# Altium PCB 球锁蓝牙20618.PcbDoc (part 1 of 2)
Units mil, origin at the board's own origin, x right, y up, seen from the top; angles counter-clockwise.
Board outline 1946 x 1905.51 mil, 2 copper layers (Top Layer, Bottom Layer); 90 components, 56 nets, 267 pads, 202 vias.
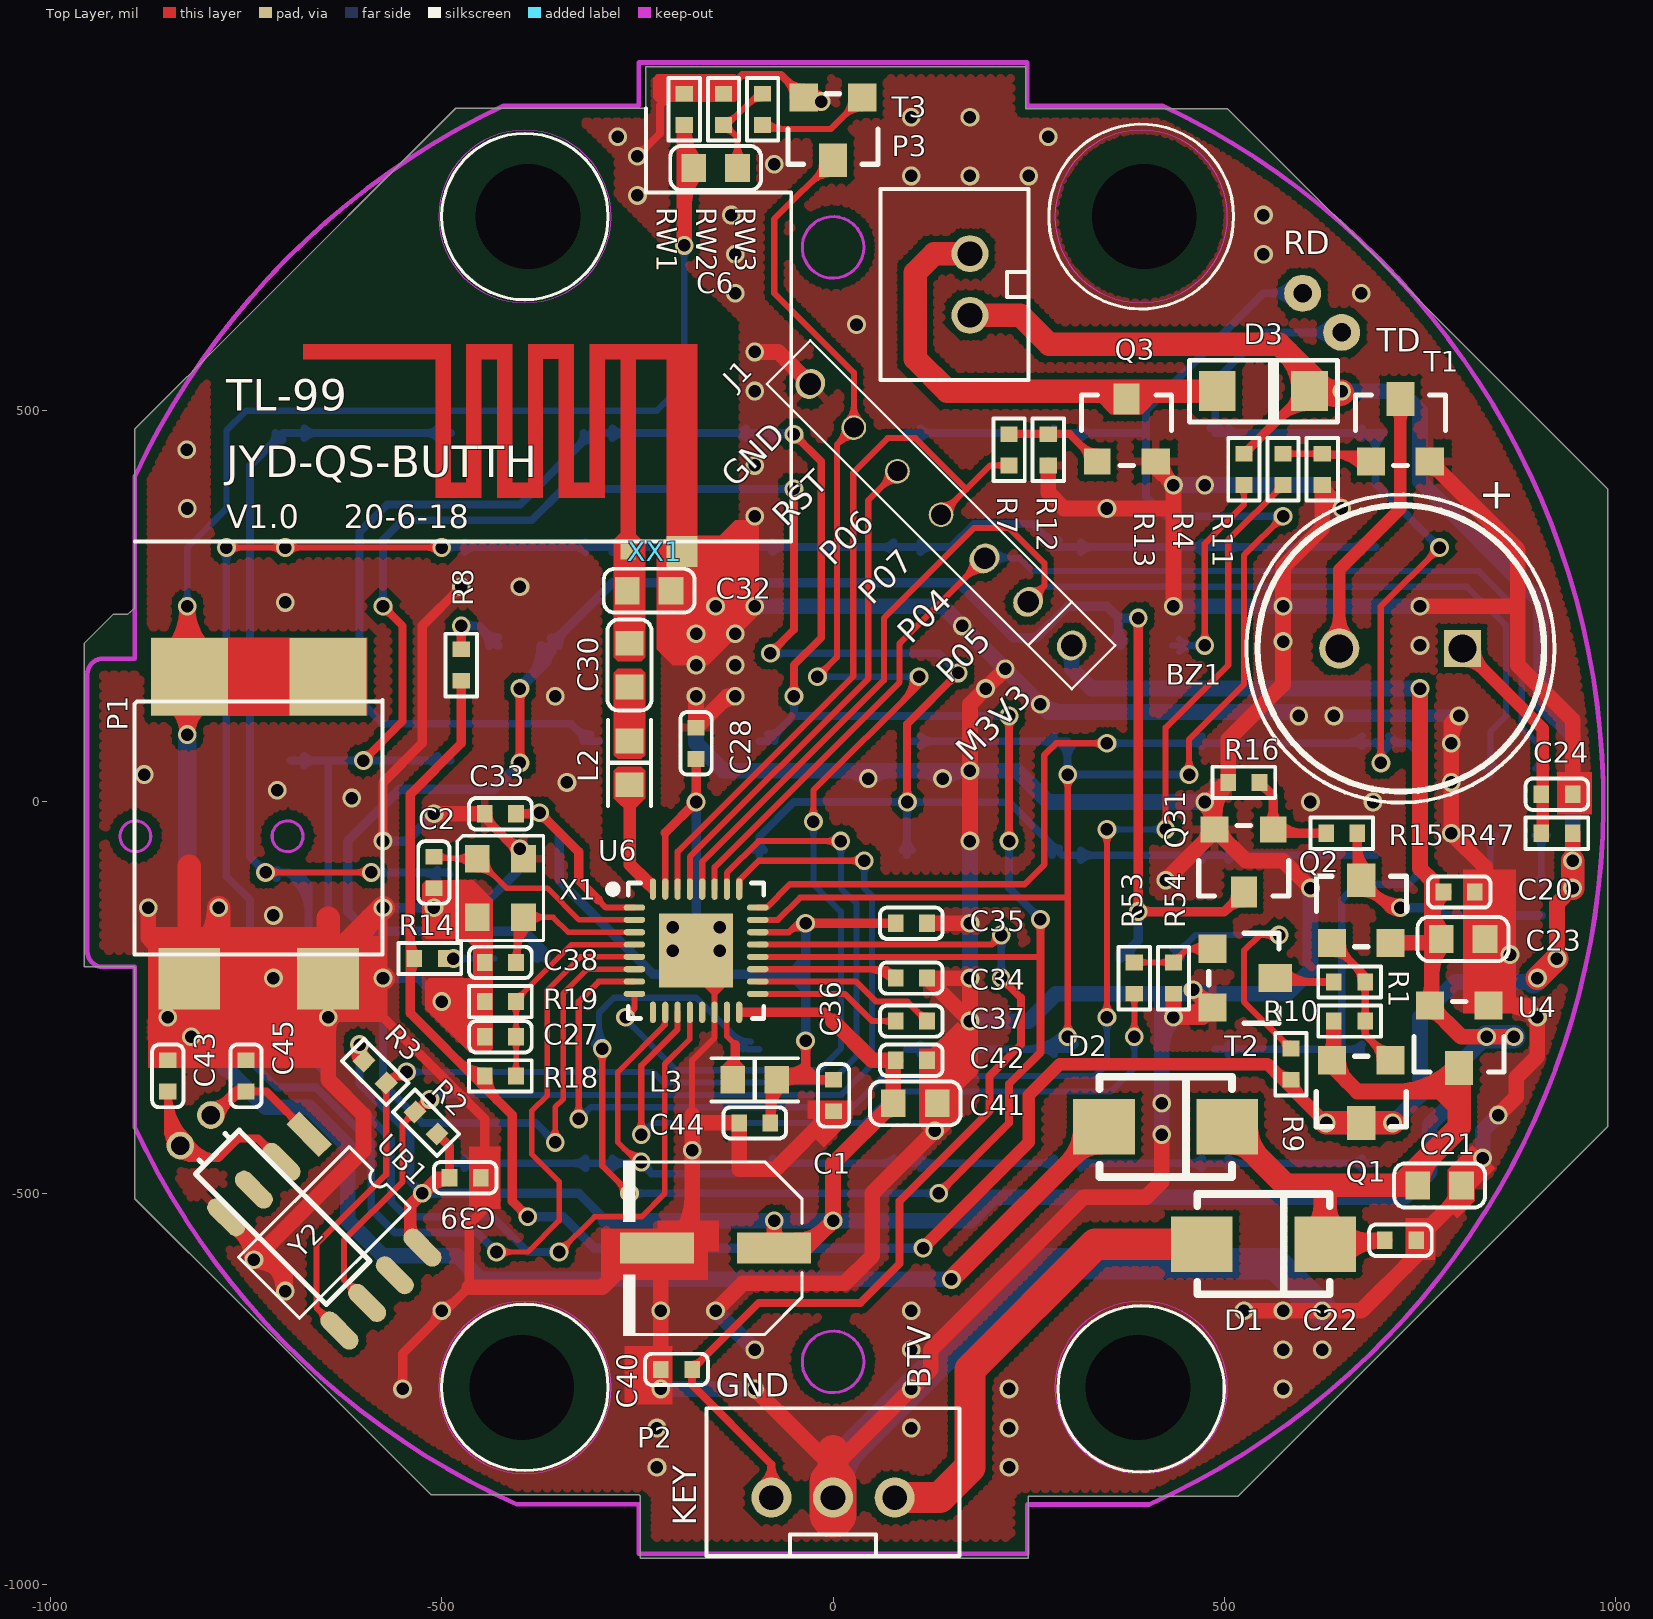
[diagram p0: Top Layer view]
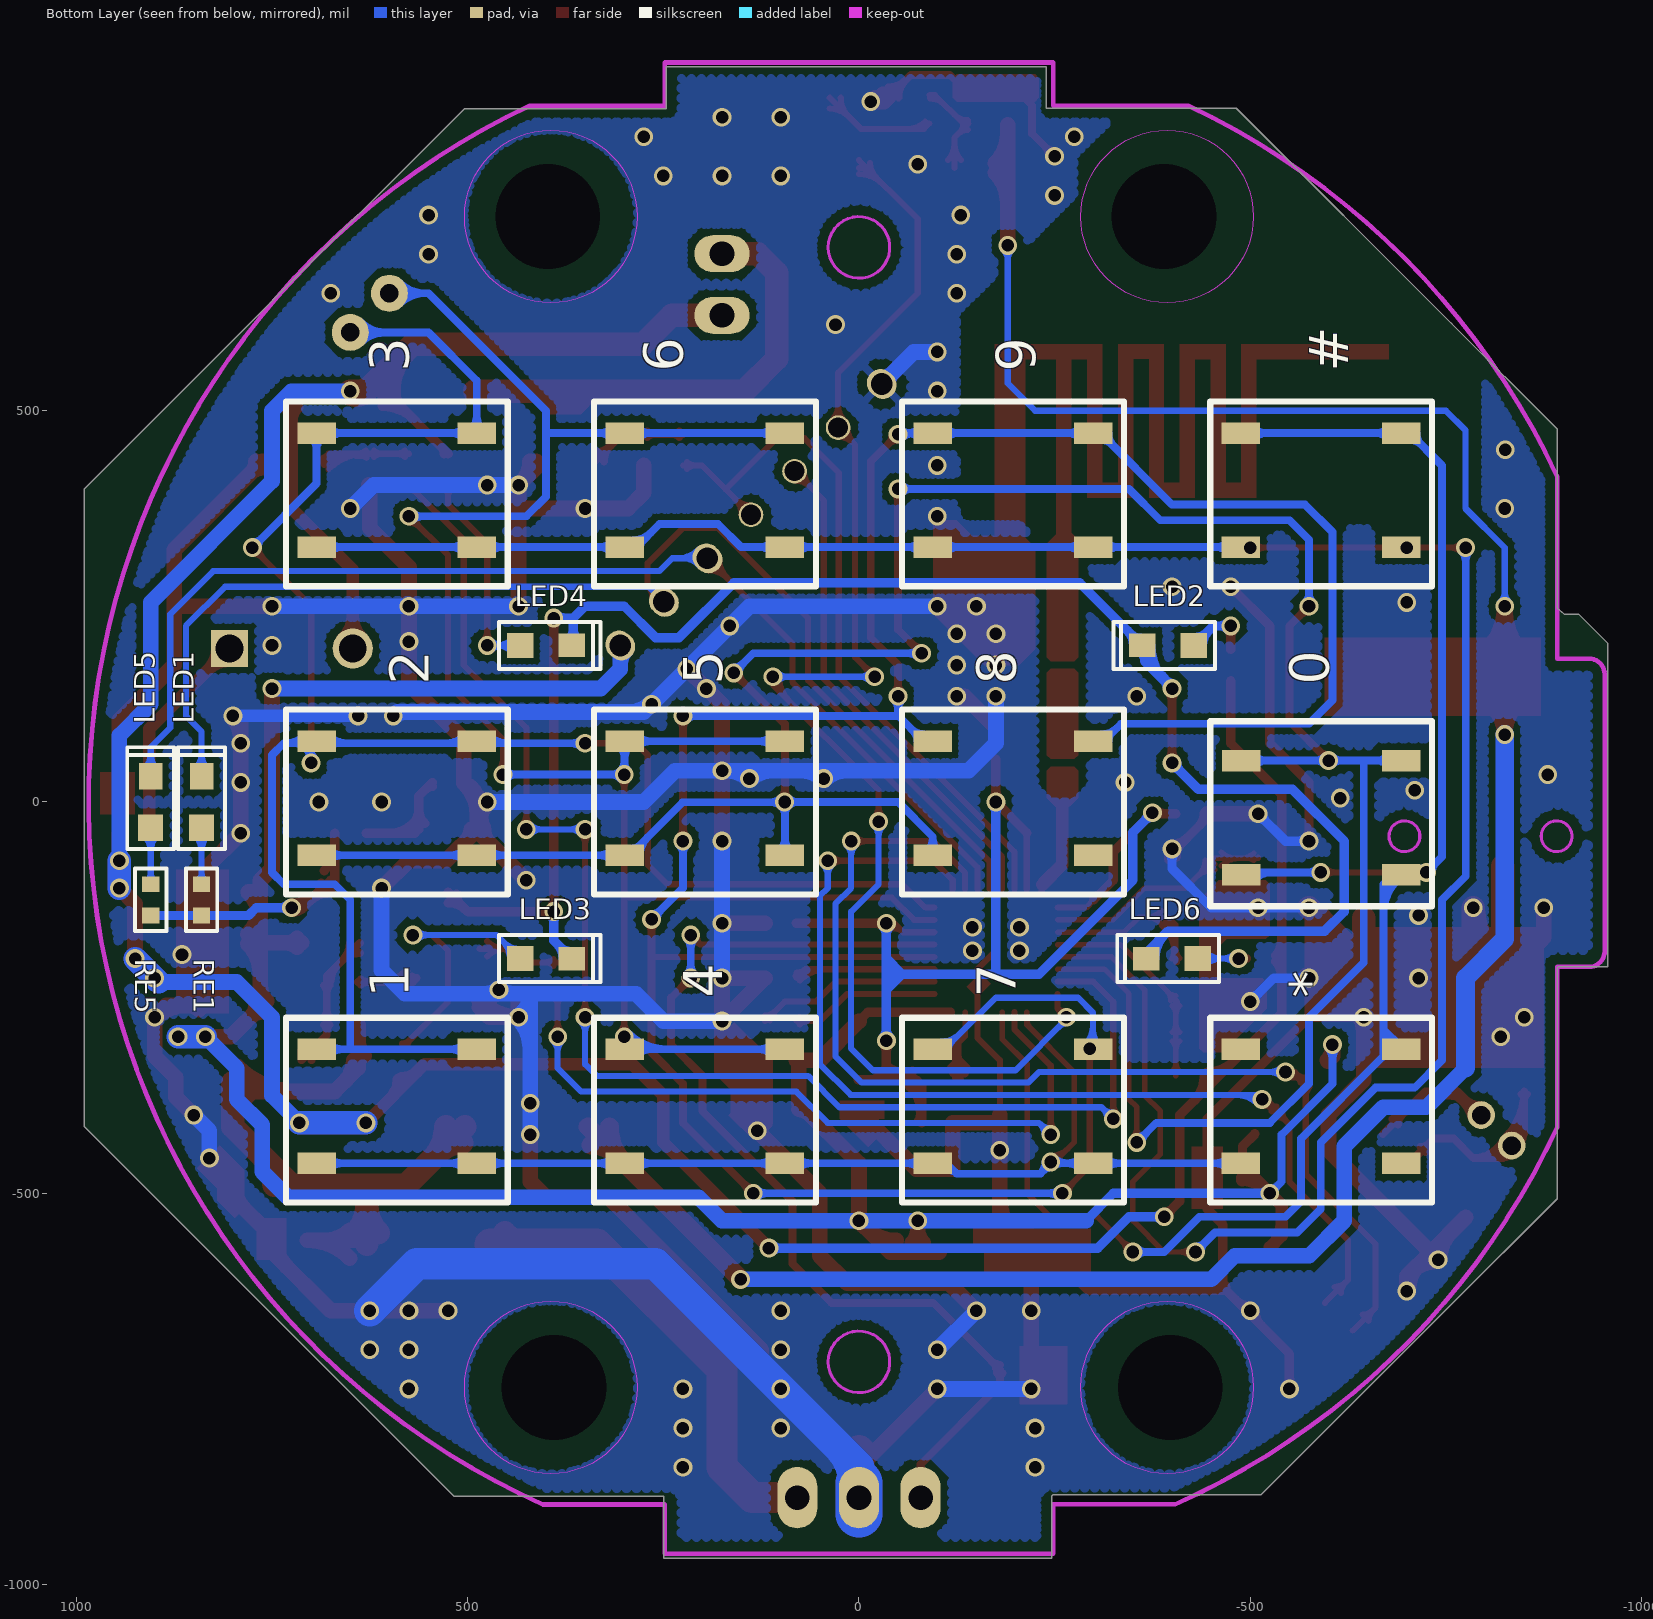
[diagram p1: Bottom Layer view, seen from below]
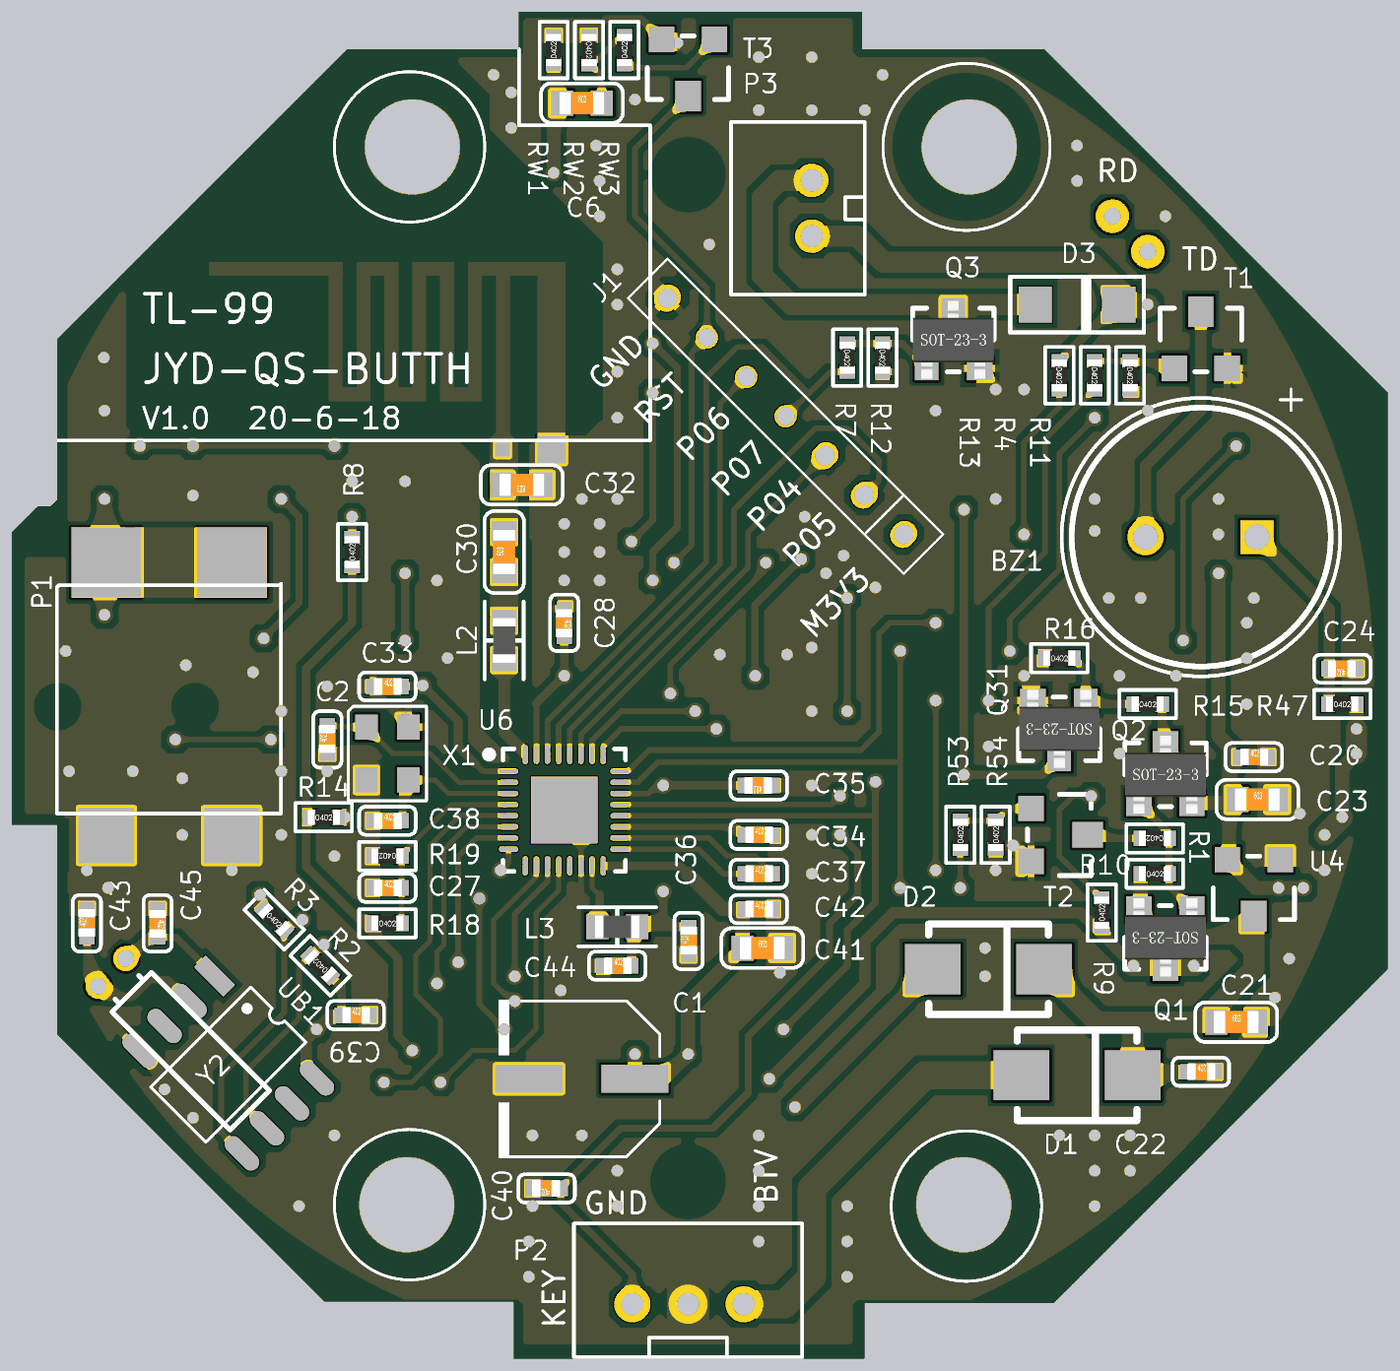
[diagram p3: 3D render of the assembled board from above, using the file's embedded part models]

## Layer stack, top to bottom
Top Layer: signal copper 1.4
Dielectric: core 12.6, FR-4, Dk 4.8
Bottom Layer: signal copper 1.4

## Board outline
-892.08,248.2 -892.08,390.26 -892.08,476.48 -757.1,611.46 -482.14,886.43 -409.85,886.43 -239.09,886.43 -239.09,939.38 245.95,939.38 245.95,885.99 402.13,885.99 503.79,885.99 762.58,627.2 989.58,400.2 989.58,-89.8 989.58,-414.97 678.73,-725.82 517.15,-887.39 249.49,-887.39 249.49,-966.13 -238.42,-966.13 -246.18,-966.13 -246.18,-887 -248.27,-884.9 -454.66,-884.9 -514.02,-884.9 -753.26,-645.66 -892.08,-506.84 -892.08,-424.8 -892.08,-211.4 -892.68,-210.8 -956.42,-210.8 -956.42,203.07 -930.88,228.61 -919.85,239.64 -901.42,239.64

## Design rules (kind name [scope] priority, off if disabled: settings)
Clearance Clearance_1 [(InPoly)Or(IsKeepOut) vs (InPoly)Or(IsKeepOut)] p1: gap=12
Clearance [All] p2: gap=7.87
ComponentClearance [All] p1: gap=0 collisioncheckmode=3 verticalgap=0 showdistances=FALSE
FabricationTestPointUsage TestPointUsage [All] p1: valid=0 allowmultiple=FALSE
FabricationTestpoint Testpoint [(IsPad And (OnTopLayer Or OnBottomLayer))] p1: side=3 testpointundercomponent=TRUE minsize=40 maxsize=100 preferedsize=60 minholesize=0 maxholesize=40 preferedholesize=32 testpointgrid=1 allowsidetop=TRUE allowsidebottom=TRUE usegrid=TRUE gridtolerance=0.01
HoleSize [All] p1: absolutevalues=TRUE maxlimit=1000 minlimit=1 maxpercent=80.000 minpercent=20.000
HoleToHoleClearance [All] p1: gap=0 allowstackedmicrovias=TRUE
MinimumSolderMaskSliver [All] p1: minsoldermaskwidth=0
PolygonConnect PolygonConnect_1 [IsVia] p1: connectstyle=Direct reliefconductorwidth=10 reliefentries=4 polygonreliefangle="90 Angle" airgapwidth=10
PolygonConnect [All] p2: connectstyle=Relief reliefconductorwidth=10 reliefentries=4 polygonreliefangle="90 Angle" airgapwidth=10
RoutingVias [All] p1: holewidth=15.75 width=23.62 viastyle="Through Hole" minholewidth=15.75 minwidth=23.62 maxholewidth=15.75 maxwidth=23.62
SilkToSilkClearance [All] p1: silktosilkclearance=0
SilkToSolderMaskClearance SilkscreenOverComponentPads [IsPad] p1: minsilkscreentomaskgap=0 clearancetoexposedcopper=TRUE
SolderMaskExpansion [All] p1: expansion=4
Width [All] p1: maxlimit=80 minlimit=6 preferedwidth=10
20 further rules are at their usual default settings.

## Components (designator, comment, footprint, x,y, rotation, side; value= is the part's Value field where it differs from the comment)
0 "SW" KEY_5.2*3.7*6.4 -590.55,-15 r180 bottom
1 "SW" KEY_5.2*3.7*6.4 590.55,-393.7 r0 bottom
2 "SW" KEY_5.2*3.7*6.4 590.55,0 r0 bottom
3 "SW" KEY_5.2*3.7*6.4 590.55,393.7 r0 bottom
4 "SW" KEY_5.2*3.7*6.4 196.85,-393.7 r0 bottom
5 "SW" KEY_5.2*3.7*6.4 196.85,0 r0 bottom
6 "SW" KEY_5.2*3.7*6.4 196.85,393.7 r0 bottom
7 "SW" KEY_5.2*3.7*6.4 -196.85,-393.7 r0 bottom
8 "SW" KEY_5.2*3.7*6.4 -196.85,0 r0 bottom
9 "SW" KEY_5.2*3.7*6.4 -196.85,393.7 r0 bottom
# "SW" KEY_5.2*3.7*6.4 -590.55,393.7 r0 bottom
* "SW" KEY_5.2*3.7*6.4 -590.55,-393.7 r0 bottom
BZ1 "BUZZER" BUZZER_D93_L40 725.58,196.2 r180 top locked
C1 "220uF/6.3V" R5*5.8 -150,-570 r180 top
C2 "12pF" 0402C -510,-90 r90 top
C6 "10uF/10V" 0603C -150,810 r0 top (schematic designator C?)
C20 "0.1uF" 0402C 800,-115 r0 top
C21 "22uF/10V" 0603C 775,-490 r0 top
C22 "0.1uF" 0402C 725,-560 r0 top
C23 "10uF/10V" 0603C 805,-175 r0 top
C24 "10uF/10V" 0402C 925,10 r180 top
C27 "1nF" 0402C -425,-300 r0 top
C28 "1uF/6.3V" 0402C -175,75 r270 top
C30 "1.5pF" 0603C -260,175 r90 top
C32 "1pF" 0603C -235,270 r180 top
C33 "0.1uF" 0402C -425,-15 r0 top
C34 "0.1uF" 0402C 100,-225 r0 top
C35 "1uF" 0402C 100,-155 r180 top
C36 "0.1uF" 0402C 0.75,-375 r90 top
C37 "0.1uF" 0402C 100,-280 r0 top
C38 "12pF" 0402C -425,-205 r0 top
C39 "0.1uF" 0402C -470,-480 r0 top
C40 "1nF" 0402C -200,-725 r180 top
C41 "10uF/6.3V" 0603C 105,-385 r0 top
C42 "0.1uF" 0402C 100,-330 r0 top
C43 "22PF" 0402C -850,-350 r90 top (schematic designator C26)
C44 "10uF/6.3V" 0402C -100,-410 r0 top
C45 "22PF" 0402C -750,-350 r270 top (schematic designator C28)
D1 "SS14" DO-214AA 550,-565 r180 top
D2 "SS14" DO-214AA 425,-415 r180 top
D3 "IN4148" SOD-123 550,525 r0 top
J1 "7P" 7P-2.0MM 305,200 r135 top
L2 "2nH" 0603L -260,50 r270 top
L3 "2.2uH" 0603L -100,-355 r180 top
LED1 "GREEN" 0603LED 840,0 r90 bottom
LED2 "Blue" 0603LED -395,200 r0 bottom
LED3 "Blue" 0603LED 400,-200 r180 bottom
LED4 "Blue" 0603LED 400,200 r180 bottom
LED5 "Red" 0603LED 905,0 r90 bottom
LED6 "Blue" 0603LED -400,-200 r0 bottom
P1 "MICROUSB" yingjix -819.42,-221.8 r90 top
P2 "电池盒" B3B-PH 0,-888.78 r180 top
P3 "外接磁线圈" B2B-PH 175,661.22 r270 top
Q1 "SI2301" "SOT-23 - GDS" 675,-370 r180 top
Q2 "SI2301" "SOT-23 - GDS" 675,-140 r0 top
Q3 "S8050" "SOT-23 - BCE" 375,475 r0 top
Q31 "PMBT3904" "SOT-23 - BCE" 525,-75 r180 top
R1 "1K" 0402R 660,-230 r180 top
R2 "10K" 0402R -520,-410 r135 top (schematic designator R24)
R3 "10K" 0402R -585,-345 r315 top (schematic designator R25)
R4 "1K" 0402R 575,425 r270 top
R7 "1K" 0402R 225,450 r270 top
R8 "1k" 0402R -475,175 r90 top
R9 "1K" 0402R 585,-335 r90 top
R10 "100K" 0402R 660,-280 r0 top
R11 "10K" 0402R 625,425 r270 top
R12 "10K" 0402R 275,450 r270 top
R13 "1K" 0402R 525,425 r270 top
R14 "1K" 0402R -515,-200 r0 top
R15 "10K" 0402R 650,-40 r0 top
R16 "4.7K" 0402R 525,25 r0 top
R18 "500K%1" 0402R -425,-350 r0 top
R19 "100K%1" 0402R -425,-255 r180 top
R47 "10R" 0402R 925,-40 r0 top
R53 "1K" 0402R 385,-225 r90 top
R54 "10K" 0402R 435,-225 r90 top
RE1 "1K" 0402R 840,-125 r90 bottom
RE5 "1K" 0402R 905,-125 r90 bottom
RW1 "100K" 0402R -190,885 r90 top
RW2 "100K" 0402R -140,885 r270 top
RW3 "100R" 0402R -90,885 r90 top
T1 "SS8050" SOT-23-3L 725,475 r0 top
T2 "PMBT3904" SOT-23-3L 525,-225 r270 top
T3 "PMBT3904" SOT-23-3L 0,860 r180 top
U4 "HT7533" SOT-23-3L 800,-300 r180 top
U6 "BK3431Q" QFN32_4*4*0.4 -175,-190 r0 top
UB1 "PCF8563" SOP8 -650,-550 r315 top (schematic designator U5)
X1 "16MHZ" XTAL3225 -425,-110 r270 top
XX1 "TIANX" BT_NAMI_1 -262,290 r0 top
Y2 "32.768KHZ" 晶振-9 -795,-400 r225 top (schematic designator Y1)

## Footprints (in the part's own frame and the unit in brackets; to place one, negate y for a bottom-side part, rotate by r counter-clockwise, add the part's x,y. Pads: shape width x height; smd on the part's side, far side on the other; paste and mask are expansions set on the pad)
7P-2.0MM [mm]
  oval 0.9x1 hole 0.7 mask+0.05: 1(0,0) 2(2,0) 3(4,0) 7(12,0)
  round 0.8 hole 0.65 mask+0.05: 4(6,0) 5(8,0) 6(10,0)
  silkscreen extent -1,-1 13,1
0402C [mil]
  rect 20x22 smd mask+2: 1(-20,0) 2(20,0)
  silkscreen extent -40,-20 40,20, body extent -19,-12 20,12, height 8
0402R [mil]
  rect 20x22 smd mask+2: 1(-20,0) 2(20,0)
  silkscreen extent -40,-20 40,20, body extent -23,-11 23,11, height 16
0603C [mm]
  rect 0.8x0.9 smd: 1(-0.711,0) 2(0.711,0)
  silkscreen extent -1.47,-0.71 1.47,0.71, body extent -0.8,-0.4 0.8,0.4, height 0.3
0603L [mm]
  rect 0.8x0.9 smd: 1(-0.711,0) 2(0.711,0)
  silkscreen extent -1.4,-0.7 1.4,0.7, body extent -0.82,-0.41 0.83,0.41, height 0.46
0603LED [mil]
  rect 34x32 smd: 1(-33,0)
  rect 34x30 smd: 2(33,0)
  silkscreen extent -60,-30 70,30, body extent -31,-16 31,16, height 24
B2B-PH [mm]
  round 1.2 / inner round 1.2 / far side oval 1.2x1.8 hole 0.8 mask+0.05: 1(-1,0) 2(1,0)
  silkscreen extent -3.1,-2.9 3.1,1.9
B3B-PH [mm]
  round 1.3 / inner round 1.3 / far side oval 1.3x2 hole 0.8 mask+0.05: 1(-2,0) 2(0,0) 3(2,0)
  silkscreen extent -4.1,-2.9 4.1,1.9
BT_NAMI_1 [mm]
  rect 0.5x0.5 smd: 1(0,0.762)
  rect 1x1 smd: 2(1.753,0.762)
  Top Layer region: -3.25,7.004 -1.75,7.004 -1.75,7.504 -3.25,7.504
  Top Layer region: -2.25,2.5 -1.75,2.5 -1.75,7.5 -2.25,7.5
  Top Layer region: -2.25,2.5 -0.75,2.5 -0.75,3 -2.25,3
  Top Layer region: -1.25,2.504 -0.75,2.504 -0.75,7.504 -1.25,7.504
  Top Layer region: -1.25,7 2.25,7 2.25,7.5 -1.25,7.5
  Top Layer region: -0.247,0.762 0.253,0.762 0.253,7.5 -0.247,7.5
  Top Layer region: 1.25,0.762 2.25,0.762 2.25,7.5 1.25,7.5
  Top Layer region: -3.25,2.5 -2.75,2.5 -2.75,7.5 -3.25,7.5
  Top Layer region: -4.25,2.5 -2.75,2.5 -2.75,3 -4.25,3
  Top Layer region: -4.25,2.499 -3.75,2.499 -3.75,7.499 -4.25,7.499
  Top Layer region: -5.25,7 -3.75,7 -3.75,7.5 -5.25,7.5
  Top Layer region: -5.249,2.5 -4.749,2.5 -4.749,7.5 -5.249,7.5
  Top Layer region: -6.25,2.5 -4.75,2.5 -4.75,3 -6.25,3
  Top Layer region: -6.25,2.499 -5.75,2.499 -5.75,7.499 -6.25,7.499
  Top Layer region: -10.55,7 -5.75,7 -5.75,7.5 -10.55,7.5
BUZZER_D93_L40 [mm]
  rect 1.2x1.2 hole 0.9: 1(-2,0)
  round 1.3 hole 0.9: 2(2,0)
  silkscreen extent -4.65,-4.65 4.65,4.65
DO-214AA [mm]
  rect 2x1.8 smd: 1(2,0) 2(-2,0)
  silkscreen extent -2.15,-1.63 2.15,1.63
KEY_5.2*3.7*6.4 [mm]
  rect 1.25x0.7 smd: 1(-2.595,1.726) 1(2.604,1.726) 2(-2.595,-1.974) 2(2.604,-1.974)
  silkscreen extent -3.6,-3 3.6,3
QFN32_4*4*0.4 [mm]
  rect 2.4x2.4 smd paste-0.025 mask+0.051: 0(0,0)
  oval 0.7x0.2 smd paste-0.025 mask+0.051: 1(-2,1.4) 2(-2,1) 3(-2,0.6) 4(-2,0.2) 5(-2,-0.2) 6(-2,-0.6) 7(-2,-1) 8(-2,-1.4) 17(2,-1.4) 18(2,-1) 19(2,-0.6) 20(2,-0.2) 21(2,0.2) 22(2,0.6) 23(2,1) 24(2,1.4)
  oval 0.2x0.7 smd paste-0.025 mask+0.051: 9(-1.4,-2) 10(-1,-2) 11(-0.6,-2) 12(-0.2,-2) 13(0.2,-2) 14(0.6,-2) 15(1,-2) 16(1.4,-2) 25(1.4,2) 26(1,2) 27(0.6,2) 28(0.2,2) 29(-0.2,2) 30(-0.6,2) 31(-1,2) 32(-1.4,2)
  silkscreen extent -2.82,-2.2 2.2,2.2
R5*5.8 [mm]
  rect 2.4x1 smd: 1(-1.9,0) 2(1.9,0)
  silkscreen extent -2.8,-2.85 3,2.85
SOD-123 [mm]
  rect 1.2x1.3 smd mask+0.05: 1(-1.5,0) 2(1.5,0)
  silkscreen extent -2.4,-1 2.4,1
SOP8 [mm]
  rect 1.5x0.6 smd mask+0.05: 1(-2.6,1.905)
  oval 1.5x0.6 smd mask+0.05: 2(-2.6,0.635) 3(-2.6,-0.635) 4(-2.6,-1.905) 5(2.6,-1.905) 6(2.6,-0.635) 7(2.6,0.635) 8(2.6,1.905)
  round 0.4 on Top Overlay mask+0.05: ""(-0.949,1.905)
  silkscreen extent -1.4,-2.54 1.4,2.54
"SOT-23 - BCE" [mm]
  rect 0.85x0.85 smd: B(-0.95,-1.016)
  rect 0.85x1 smd: C(0,1.016)
  rect 0.914x0.85 smd: E(0.95,-1.016)
  silkscreen extent -1.46,-1.14 1.46,1.14, body extent -1.45,-1.4 1.45,1.4, height 1.2
"SOT-23 - GDS" [mil]
  rect 36x43.31 smd: D(0,40)
  rect 36x36 smd: G(-37.4,-40) S(37.4,-40)
  silkscreen extent -57,-45 58,45, body extent -57,-55 57,55, height 47
SOT-23-3L [mil]
  rect 36x36 smd: 1(-37.4,-40) 2(37.4,-40)
  rect 36x43.31 smd: 3(0,40)
  silkscreen extent -57,-45 58,45
XTAL3225 [mm]
  rect 0.9x0.8 smd: 1(-0.95,-0.75) 2(0.95,-0.75) 3(0.95,0.75) 4(-0.95,0.75)
  silkscreen extent -1.7,-1.4 1.7,1.4
yingjix [mm]
  rect 2x2 smd: 1(-0.102,0.076) 1(-0.102,-4.424)
  rect 2.5x2.5 smd: 2(9.698,-4.424) 2(9.698,0.076)
  silkscreen extent 0.69,-6.2 8.94,1.85
晶振-9 [mm]
  round 0.9 hole 0.6: 1(0,0) 2(1.4,0)
  rect 0x0 smd: 3(0.635,8)
  silkscreen extent -0.3,0.76 1.7,7

## Part data
0 1 2 3 4 5 6 7 8 9 # *: "Switch"
BZ1: "Buzzer"
C1 C21 C23: library part CAP-P, "Capacitor, tolerance ±20%"
C2 C28 C30 C32 C33 C34 C35 C36 C37 C38 C41 C42 C44: library part Cap, "Capacitor"
C6 C20 C22 C27: library part CAP-NP, "Capacitor, Ceramic"
C24: library part C_0_Dup1
C39 C40 C43 C45: library part C
D1 D2 D3: library part D
L2 L3: "Power Inductor, 4.7uH, 0.7A, 260mR DCR"
LED1 LED2 LED3 LED4 LED5 LED6: library part LED
P1: library part MHDR1X2, "Header, 2-Pin"
P2: library part "Header 3", "Header, 3-Pin"
P3: library part "Header 2", "Header, 2-Pin"
Q1 Q2: library part PWRMOSFET_EP_DGS_0
Q3: library part PMBT3904_Dup1
R1 R8 R9 R10 R13 R14 R15 R16 R53 R54 RE1 RE5 RW1 RW2 RW3: library part R
R2 R3 R7 R12: library part RES
R4 R11 R47: library part R_Dup1
R18 R19: library part Res2, "Resistor"
T1 T2 T3: library part NPN_BJT, "Bipolar Junction Transistor"
U4: library part XC6206P302M
UB1: library part IC8
Y2: library part 晶振

## Free pads (board coordinates)
  round 47.24 hole 23.62: 0(650,600) 1(600,650)
  round 10 hole 133.86: 1(-397.64,-748.03) 2(-389.76,748.03) 3(397.64,748.03) 4(389.76,-748.03)

## Via types
v1: diameter 24, hole 16, Top Layer to Bottom Layer, tented both sides, 202 vias

## Nets (pads, with @x,y where several pads share a name; then routed paths per layer and width w, separated by ;. In a path a pad name is that pad's centre, name@x,y a point inside that pad or via, vN(x,y) a via of type N, cw(c..) or ccw(c..) an arc to the next point about the centre after c; other vN are vias at no path point)
BAT_ADC: C27.2 R18.2 R19.1 U6.4 | length 401.7
  Top Layer w7: R18.2@-409.6,-344.4 ccw(c-420.69,-333.31) -405,-333.31 ccw(c-389.31,-333.31) R18.2@-400.4,-344.4 ; C27.2@-409.6,-305.6 cw(c-420.69,-316.69) -405,-316.69 cw(c-389.31,-316.69) C27.2@-400.4,-305.6 ; C27.2@-409.6,-294.4 ccw(c-420.69,-283.31) -405,-283.31 ccw(c-389.31,-283.31) C27.2@-400.4,-294.4 ; R19.1@-409.6,-260.6 cw(c-420.69,-271.69) -405,-271.69 cw(c-389.31,-271.69) R19.1@-400.4,-260.6 ; R19.1@-407,-255 -334.13,-182.13 U6.4@-253.74,-182.13 ; R18.2@-405,-350 R19.1@-405,-255 ; R19.1@-405,-247.5 ccw(c-405,-234.22) -395.61,-243.61 ; R19.1@-398.5,-254 cw(c-380.39,-254) -393.2,-241.2
BEEP: R4.2 U6.7 | length 2074.9
  Top Layer w7.87: v1@-330.57,-399.43 ccw(c-344.01,-385.99) -325,-385.99 ccw(c-305.99,-385.99) v1@-319.43,-399.43 ; v1(-325,-405) -325,-255 -299.37,-229.37 U6.7@-253.74,-229.37 ; v1@344.43,-269.43 ccw(c330.99,-255.99) 350,-255.99 ccw(c369.01,-255.99) v1@355.57,-269.43 ; v1@344.43,-40.57 cw(c330.99,-54.01) 350,-54.01 cw(c369.01,-54.01) v1@355.57,-40.57 ; v1(350,-275) v1(350,-35) ; v1@419.43,-29.43 ccw(c405.99,-15.99) 425,-15.99 ccw(c444.01,-15.99) v1@430.57,-29.43 ; v1(425,-35) 425,95 505,175 505,335 R4.2@575,405 ; 562.94,392.94 ccw(c550.89,405) R4.2@567.94,405 ; R4.2@565.36,395.36 cw(c574,386.71) R4.2@574,398.94
  Bottom Layer w7.87: v1(-325,-405) -310,-390 25,-390 65,-350 335,-350 350,-335 v1(350,-275) ; v1@-325,-397.13 ccw(c-325,-378.12) -311.56,-391.56 ccw(c-298.12,-405) v1@-317.13,-405 ; v1@344.43,-280.57 cw(c330.99,-294.01) 350,-294.01 cw(c369.01,-294.01) v1@355.57,-280.57 ; v1(350,-35) v1(425,-35) ; v1@355.57,-40.57 cw(c369.01,-54.01) 369.01,-35 cw(c369.01,-15.99) v1@355.57,-29.43 ; v1@419.43,-40.57 ccw(c405.99,-54.01) 405.99,-35 ccw(c405.99,-15.99) v1@419.43,-29.43
GND: C1.2 C2.1 C20.2 C21.2 C22.2 C23.2 C24.1 C27.1 C28.1 C30.2 C32.1 C32.2 C33.1 C34.2 C35.1 C36.1 C38.1 C39.2 C40.2 C41.2 C42.2 C43.2 C44.1 C45.1 J1.7 P1.1 P2.2 Q3.E Q31.E R11.2 R12.2 R16.1 R19.2 R54.1 RW1.2 RW2.1 T1.2 T2.2 T3.2 U4.1 U6.0 U6.14 UB1.4 X1.2 X1.4 XX1.1 XX1.2 | length 19333.8
  Top Layer w7.87: -180,-400 -180,-330 -151.38,-301.38 U6.14@-151.38,-268.74 -151.38,-213.62 U6.0@-175,-190
  Top Layer w10: -645,-325 -645.26,-324.74 -645,-324.49 ; v1(-250,825) -221.22,853.78 -221.22,890 -207,904.22 RW2.1@-140,904.22 ; v1@-250,832 ccw(c-250,848.9) -238.05,836.95 ccw(c-226.1,825) v1@-243,825 ; -204.95,904.22 ccw(c-204.95,918.95) RW1.2@-194.54,908.54 ; -201.19,904.22 cw(c-201.19,894.81) RW1.2@-194.54,901.46 ; RW1.2@-185.46,901.46 cw(c-178.81,894.81) -178.81,904.22 ; RW1.2@-185.46,908.54 ccw(c-175.05,918.95) -175.05,904.22 ; -154.95,904.22 ccw(c-154.95,918.95) RW2.1@-144.54,908.54 ; -151.19,904.22 cw(c-151.19,894.81) RW2.1@-144.54,901.46 ; RW2.1@-140,905 -115.94,929.06 -66.46,929.06 T3.2@-37.4,900 ; RW2.1@-139,910 ccw(c-139,919.66) RW2.1@-132.17,912.83 ; RW2.1@-134,905 cw(c-119.51,905) -129.76,915.24 ; T3.2@-50.4,900 ccw(c-81.79,900) -59.59,922.19 ccw(c-37.4,944.38) T3.2@-37.4,913
  Top Layer w12: P1.1@-645.26,-225.8 -644.46,-225 v1(-575,-225) ; P1.1@-628.95,-211.99 ccw(c-600.88,-188.24) -600.88,-225 ; P1.1@-628.45,-238.99 cw(c-599.68,-261.57) -599.68,-225 ; P1.1@-619.79,-204.24 ccw(c-575,-166.33) v1(-575,-225) ; P1.1@-619.01,-246.4 cw(c-575,-280.94) v1(-575,-225) ; v1@-580.03,-227.91 ccw(c-592.18,-234.92) -588.55,-221.37 ccw(c-584.92,-207.81) v1@-577.91,-219.97 ; v1@-580.03,-222.09 cw(c-592.18,-215.08) -588.55,-228.63 cw(c-584.92,-242.18) v1@-577.91,-230.03 ; v1@-579.24,-45.76 ccw(c-589.49,-35.51) -575,-35.51 ccw(c-560.51,-35.51) v1@-570.76,-45.76 ; v1@-579.11,-139.11 cw(c-589.03,-149.03) -575,-149.03 cw(c-560.97,-149.03) v1@-570.89,-139.11 ; v1(-575,-135) v1(-575,-225) ; v1(-575,-50) -575,25 -525,75 -525,225 v1(-475,275) ; v1@-570.89,-229.11 ccw(c-560.97,-239.03) -575,-239.03 ccw(c-589.03,-239.03) -579.11,-229.11 ccw(c-589.03,-239.03) -589.03,-225 ccw(c-589.03,-210.97) -579.11,-220.89 ccw(c-589.03,-210.97) -575,-210.97 ccw(c-560.97,-210.97) v1@-570.89,-220.89 ; v1@-554.24,-745.76 ccw(c-564.49,-735.51) -550,-735.51 ccw(c-535.51,-735.51) v1@-545.76,-745.76 ; v1(-550,-750) -550,-705 -465,-620 -465,-540 -445,-520 -445,-405 -575,-275 v1(-575,-225) ; v1@-514.38,-139.38 ccw(c-495,-120) -495,-147.4 ; v1@-514.11,-130.89 ccw(c-524.03,-120.97) -510,-120.97 ccw(c-495.97,-120.97) -505.89,-130.89 ccw(c-466.03,-91.03) X1.2@-466.03,-147.4 ; -513.78,-668.78 ccw(c-532.56,-650) v1@-506,-650 ; v1@-510,-140.81 cw(c-510,-154.84) -500.08,-144.92 cw(c-490.16,-135) v1@-504.19,-135 ; C2.1@-510,-110 v1(-510,-135) -497.6,-147.4 X1.2@-454.53,-147.4 ; v1@-500,-644 ccw(c-500,-617.44) -481.22,-636.22 ; v1(-500,-255) R19.2@-445,-255 ; v1@-495.89,-259.11 cw(c-485.97,-269.03) -485.97,-255 cw(c-485.97,-240.97) v1@-495.89,-250.89 ; v1@-480.81,275 cw(c-494.84,275) -484.92,265.08 cw(c-475,255.16) v1@-475,269.19 ; X1.2@-461.42,-154.29 ccw(c-478.06,-170.94) -478.06,-147.4 ccw(c-478.06,-123.87) X1.2@-461.42,-140.51 ; C39.2@-452.83,-483.83 cw(c-471.73,-502.73) -445,-502.73 ; C39.2@-452.83,-476.17 ccw(c-471.73,-457.27) -445,-457.27 ; C27.1@-445,-300 R19.2@-445,-255 ; C38.1@-445,-205 R19.2@-445,-255 ; C33.1@-445,-15 -445,-20 -395.47,-69.53 X1.4@-395.47,-72.6 ; C33.1@-441,-16 ccw(c-421.69,-16) -435.34,-29.66 ; -418.78,-46.22 ccw(c-400,-27.44) v1@-400,-54 ; -412.89,-52.11 cw(c-431.42,-70.63) X1.4@-405.22,-70.63 ; v1@-410.23,-54.77 ccw(c-395.47,-40.01) X1.4@-395.47,-60.88 ; X1.4@-401.41,-65.83 cw(c-403.25,-73.39) X1.4@-395.47,-73.39 ; C32.1@-207,270 -193,270 -170,270 v1(-150,250) ; C32.1@-200.11,263.11 cw(c-183.47,246.47) -183.47,270 cw(c-183.47,293.53) C32.1@-200.11,276.89 ; v1@-155.81,250 ccw(c-169.84,250) -159.92,259.92 ccw(c-150,269.84) v1@-150,255.81
  Top Layer w20: v1(-875,-135) -875,-173.22 P1.1@-822.42,-225.8 -850,-253.38 C43.2@-850,-330 C45.1@-750,-330 ; P1.1@-851.79,-225.8 ccw(c-922.7,-225.8) -872.56,-175.66 ccw(c-822.42,-125.52) P1.1@-822.42,-196.43 ; v1@-851.48,-276.34 cw(c-876.93,-299.42) -843.58,-307.67 ; v1@-850.11,-273 ccw(c-853.53,-212.59) P1.1@-808.4,-252.89 ; -850,-295.73 cw(c-774.72,-295.73) P1.1@-817.14,-233.54 ; P1.1@-850,-257.88 cw(c-800.54,-257.88) P1.1@-828.41,-217.02 ; v1@-848,-275 cw(c-790.97,-275) P1.1@-831.3,-234.67 ; UB1.4@-775.41,-530.65 -730.53,-575.53 ; UB1.4@-756.8,-549.26 cw(c-792.54,-585) v1@-742,-585 ; -750,-225.8 C45.1@-750,-330 ; v1@-740,-587 cw(c-740,-637.54) -704.26,-601.8 ; v1(-740,-585) -730.53,-575.53 ; -716.48,-589.59 cw(c-751.89,-625) v1@-701.81,-625 ; v1(-700,-625) -700,-606.07 -730.53,-575.53 ; P1.1@-666.02,-246.56 cw(c-716.78,-297.32) -645,-297.32 ; P1.1@-659,-251.75 cw(c-671.3,-275) v1(-645,-275) ; -653.77,-266.4 ccw(c-641.12,-258.58) v1@-644.54,-273.05 ; -645,-335 -650,-330 C45.1@-750,-330 ; -645,-296.09 cw(c-574.97,-296.09) P1.1@-624.49,-246.56 ; P1.1@-631.12,-251.54 ccw(c-618.24,-275) v1(-645,-275) ; v1(-510,-15) C33.1@-445,-15 ; -465,-620 -295,-620 -250,-575 C1.2@-222.83,-575 ; -274.1,-599.1 ccw(c-303.2,-570) C1.2@-262.05,-570 ; C1.2@-231.65,-576.85 cw(c-259.78,-604.98) -220,-604.98 ; v1(-220,-750) C40.2@-220,-725 v1(-220,-650) -220,-577.83 C1.2@-222.83,-575 ; C32.1@-211.06,276.03 ccw(c-254.68,319.64) XX1.2@-193,319.64 ; C1.2@-204.09,-563.15 ccw(c-262.26,-504.99) -180,-504.99 ; XX1.2@-201.39,315.16 cw(c-221.91,303.31) -199.02,297.18 ; -200,215 -150,215 ; XX1.2@-199.85,313.15 cw(c-216.38,296.62) -193,296.62 cw(c-169.62,296.62) XX1.2@-186.15,313.15 ; -198.91,297.61 cw(c-176.62,291.64) XX1.2@-188.16,311.61 ; C32.1@-193,270 XX1.2@-193,320 ; C1.2@-189.95,-577.29 ccw(c-213.97,-553.27) C1.2@-180,-553.27 ; -180,-400 -180,-410 ; v1(-175,135) C28.1@-175,95 -135,135 v1(-125,135) ; v1(-150,-650) -115,-615 15,-615 50,-580 50,-500 v1(130,-420) 133,-417 C41.2@133,-385 175,-343 175,-330 ; -145.49,124.51 cw(c-125,104.03) v1@-125,133 ; v1(-100,-750) 0,-850 ; v1(-100,575) -70,575 J1.7@-29.07,534.07 ; J1.7@-36.78,534.07 ccw(c-55.41,534.07) -42.24,547.24 ccw(c-29.07,560.41) J1.7@-29.07,541.78 ; T3.2@-31.9,900 cw(c-31.9,878.1) v1@-16.41,893.59 ; T3.2@-30.46,903.97 ccw(c-15,912.8) v1(-15,895) ; v1@-15.94,896.77 cw(c-24.48,912.92) T3.2@-37.4,900 ; P2.2@-11.02,-877.76 ccw(c-37.64,-851.14) 0,-851.14 ccw(c37.64,-851.14) P2.2@11.02,-877.76 ; P2.2@0,-888.78 0,-850 ; C36.1@0.75,-395 -73.29,-469.04 -120,-469.04 C44.1@-120,-410 -180,-410 ; C35.1@120,-155 v1(175,-155) ; 133,-407.93 cw(c117.93,-407.93) 128.59,-418.59 120,-410 C42.2@120,-330 175,-330 ; C41.2@133,-377.28 ccw(c133,-358.65) C41.2@146.17,-371.83 ; v1(175,-50) v1(175,40) 175,125 v1(195,145) v1(220,170) ; R12.2@275,430 275,395 295,375 v1(350,375) 435,375 ; Q3.E@412.4,435 412.4,427.6 v1(435,405) 435,375 ; v1(420,-425) 420,-485 400,-505 320,-505 125,-700 125,-725 v1(100,-750) 0,-850 ; Q3.E@420.4,435 ccw(c457.59,435) v1@431.29,408.71 ; v1(425,-100) 487.6,-37.4 Q31.E@487.6,-35 ; R54.1@435,-245 v1(435,-275) 472.4,-275 T2.2@485,-262.4 482.4,-262.4 v1(460,-240) ; v1(435,250) 435,375 ; v1@435.27,-275 ccw(c435.27,-212.67) T2.2@479.34,-256.75 ; v1@466.91,-246.91 ccw(c485,-228.82) T2.2@485,-254.4 ; 472.24,-52.76 ccw(c454.49,-35) Q31.E@479.6,-35 ; v1@473.59,-1.41 cw(c439.76,-35.24) Q31.E@487.6,-35.24 ; Q31.E@480.29,-32.02 ccw(c455.3,-19.7) v1(475,0) 487.6,-12.6 ; Q31.E@486.33,-35 Q31.E@487.6,-35 ; 487.6,-16.52 cw(c543.48,-16.52) 505,24 ccw(c512.73,0.09) 487.6,0.09 ; Q31.E@495.6,-35 ccw(c514.91,-35) Q31.E@501.25,-48.66 ; v1(525,-650) v1(575,-650) v1(625,-650) 675,-650 745,-580 C22.2@745,-560 803,-502 C21.2@803,-490 803,-482 v1(830,-455) ; v1(610,-110) 575,-75 527.6,-75 Q31.E@487.6,-35 ; R11.2@625,405 R11.2@625,400 ; R11.2@626,405 ccw(c640.49,405) 630.24,394.76 ; v1(650,375) R11.2@625,400 ; 731.56,-593.43 ccw(c699.13,-561) C22.2@745,-561 ; v1(750,250) 875,250 ; T1.2@762.4,427 cw(c762.4,407.69) 776.06,421.34 cw(c789.72,435) T1.2@770.4,435 ; T1.2@762.4,435 875,322.4 875,250 ; 786.09,-518.91 ccw(c759.16,-491.97) C21.2@797.25,-491.97 ; v1@790,81.03 cw(c828.97,81.03) v1@801.41,108.59 ; 790,95.86 cw(c802.33,95.86) v1@800.33,108.03 ; v1(800,110) 790,100 v1(790,75) v1(790,-40) 833,-83 ; C21.2@808.75,-488.03 cw(c837.19,-488.03) 817.08,-467.92 ; C20.2@820,-116 cw(c788.62,-147.38) 833,-147.38 ; C20.2@820,-114 ccw(c789.54,-83) 833,-83 ; 833,-230.06 ccw(c867.34,-230.06) 843.06,-254.34 ccw(c856.72,-240.69) 856.72,-260 ccw(c856.72,-279.31) U4.1@843.06,-265.66 ; C23.2@833.27,-182.71 cw(c835.22,-224.78) v1(865,-195) 845,-175 C23.2@833,-175 ; v1(850,-400) 873.08,-376.92 873.08,-351.92 900,-325 v1(900,-275) 885,-260 U4.1@837.4,-260 833,-255.6 C23.2@833,-175 ; 859.41,-260 cw(c859.41,-315.59) v1@898.72,-276.28 ; C24.1@945,10 945,105 875,175 875,250 ; -730.53,-575.53 -600,-445 -600,-400 -645,-355 -645,-325 -645,-324.49 v1(-645,-275) ; C1.2@-222.83,-575 -200,-575 -180,-555 -180,-410 ; T3.2@-37.4,900 -20,900 v1(-15,895) ; T3.2@-37.4,900 -32.4,895 v1(-15,895) ; 175,-330 v1(175,-280) ; v1(175,-280) C34.2@120,-225 v1(175,-225) v1(175,-280) ; Q31.E@487.6,-35 487.6,-12.6 ; 487.6,-12.6 487.6,7.6 R16.1@505,25 505,80 575,150 v1(575,205) v1(575,250) 575,300 625,350 R11.2@625,400 ; C23.2@833,-175 833,-83 ; v1@474.61,-1.96 cw(c471.43,-17.82) 487.6,-17.82 ccw(c471.43,-17.82) v1@474.61,-1.96 ; v1@475,2 ccw(c475,18.9) 486.95,6.95 cw(c475,18.9) v1@475,2
  Top Layer w30: P1.1@-839.65,-243.03 cw(c-887.1,-290.48) v1@-820,-290.48 ; P1.1@-839.65,-208.56 ccw(c-881.26,-166.96) -822.42,-166.96 ccw(c-763.59,-166.96) -805.19,-208.56 ccw(c-763.59,-166.96) -763.59,-225.8 ccw(c-763.59,-284.63) -805.19,-243.03 ccw(c-769.43,-278.79) -820,-278.79 ; P1.1@-831.36,-203.13 ccw(c-858.23,-135) v1(-785,-135) -785,-188.38 P1.1@-822.42,-225.8 ; -822.42,-82.39 P1.1@-822.42,-225.8 ; P1.1@-820.36,-231.03 ccw(c-840.84,-179.08) -785,-179.08 ; v1(-820,-300) -820,-228.22 P1.1@-822.42,-225.8 ; P1.1@-662.49,-243.03 ccw(c-704.09,-284.63) -704.09,-225.8 ccw(c-704.09,-166.96) -662.49,-208.56 ccw(c-704.09,-166.96) -645.26,-166.96 ccw(c-586.42,-166.96) -628.02,-208.56 ccw(c-586.42,-166.96) -586.42,-225.8 ccw(c-586.42,-284.63) P1.1@-628.02,-243.03 ; P1.1@-660.02,-245.18 cw(c-682.74,-275) v1@-645.26,-275 ; -645.26,-148.35 P1.1@-645.26,-205.26 ; P1.1@-630.49,-245.18 ccw(c-607.77,-275) v1@-645.26,-275 ; P1.1@-620.89,-225.8 cw(c-512.46,-225.8) -589.13,-149.13 ; v1(-575,-225) -575.8,-225.8 P1.1@-645.26,-225.8 ; v1(-575,-135) P1.1@-645.26,-205.26 ; C30.2@-262,206 XX1.1@-262,320 ; P1.1@-822.42,-225.8 -750,-225.8 P1.1@-645.26,-225.8 ; v1@-645.26,-275 P1.1@-645.26,-225.8 ; P1.1@-645.26,-225.8 P1.1@-645.26,-205.26
  Top Layer w40: P2.2@0,-880 0,-828.63
  Top Layer w60: P2.2@0,-910 P2.2@0,-870
  Bottom Layer w12: v1(-575,-225) -530,-225 v1(-500,-255) ; v1(-575,-135) v1(-510,-135) -450,-135 -400,-85 v1(-400,-60) ; v1(-575,-50) -545,-50 v1(-510,-15) ; v1@-570.89,-229.11 cw(c-560.97,-239.03) -560.97,-225 cw(c-560.97,-210.97) v1@-570.89,-220.89 ; v1@-570.89,-139.11 cw(c-560.97,-149.03) -560.97,-135 cw(c-560.97,-120.97) v1@-570.89,-130.89 ; v1@-570.76,-54.24 cw(c-560.51,-64.49) -560.51,-50 cw(c-560.51,-35.51) v1@-570.76,-45.76 ; v1@-515.81,-15 cw(c-529.84,-15) -519.92,-24.92 cw(c-510,-34.84) v1@-510,-20.81 ; v1@-514.11,-139.11 ccw(c-524.03,-149.03) -524.03,-135 ccw(c-524.03,-120.97) v1@-514.11,-130.89 ; v1@-505.89,-139.11 cw(c-495.97,-149.03) -495.97,-135 cw(c-495.97,-120.97) v1@-505.89,-130.89 ; v1@-505.81,-255 ccw(c-519.84,-255) -509.92,-245.08 ccw(c-500,-235.16) v1@-500,-249.19 ; v1@-404.24,-64.24 cw(c-414.49,-74.49) -400,-74.49 cw(c-385.51,-74.49) v1@-395.76,-64.24
  Bottom Layer w16: v1(640,110) v1(800,110)
  Bottom Layer w20: v1(-220,-750) v1(-100,-750) ; v1(-175,135) -175,75 -140,40 v1(175,40) 235,40 275,0 v1(475,0) ; v1(-150,-650) v1(-100,-700) ; v1(-100,250) 140,250 v1(165,225) v1(220,170) v1(265,125) 275,115 590,115 v1(595,110) ; v1(-100,575) -70,575 J1.7@-29.07,534.07 ; J1.7@-36.78,534.07 ccw(c-55.41,534.07) -42.24,547.24 ccw(c-29.07,560.41) J1.7@-29.07,541.78 ; 16.03,40 cw(c16.03,1.03) v1@43.59,28.59 ; v1@46.41,28.59 cw(c73.97,1.03) 73.97,40 ; 111.03,40 cw(c111.03,1.03) v1@138.59,28.59 ; v1@141.41,28.59 cw(c168.97,1.03) v1@168.97,40 ; v1(175,-280) 250,-280 285,-245 420,-245 ; v1(175,-225) v1(175,-50) ; v1@266.41,126.41 ccw(c293.97,153.97) 293.97,115 ; v1(420,-425) v1(420,-385) 420,-245 ; 420,-315.59 cw(c475.59,-315.59) v1@436.28,-276.28 ; v1(435,250) v1(575,250) v1(750,250) ; v1(435,405) v1(475,405) 620,405 v1(650,375) ; v1@435.95,-273.46 cw(c453.36,-245) 420,-245 ; 443.1,-245 ccw(c443.1,-223.1) v1@458.59,-238.59 ; v1@461.41,-238.59 ccw(c476.9,-223.1) 476.9,-245 ; 578.1,115 cw(c578.1,93.1) v1@593.59,108.59 ; v1(610,-110) 610,-215 580,-245 420,-245 ; v1(830,-455) 830,-420 v1(850,-400)
  Bottom Layer w40: P2.2@0,-888.78 0,-850 v1(100,-750) 260,-590 565,-590 v1(625,-650) ; P2.2@5.59,-875 cw(c79.44,-875) 27.22,-822.78
  Bottom Layer w60: P2.2@0,-910 P2.2@0,-870
  other v1: -225,-850 225,-850 -225,-800 100,-800 225,-800 225,-750 575,-750 100,-700 575,-700 625,-700 -500,-650 100,-650 -180,-445 -850,-275 -715,-225 -205,-190 -145,-190 -205,-160 -145,-160 -715,-145 610,0 690,0 -615,5 -710,15 -340,25 790,25 45,30 140,30 -880,35 -355,135 -175,175 -125,175 750,200 -175,215 -125,215 -700,255 -400,275 -100,365 -825,375 -100,430 -825.89,450 -100,525 30,610 -125,650 675,650 -125,700 550,700 -130,750 550,750 -250,775 100,800 175,800 250,800 -75,815 -275,850 275,850 100,875 175,875
KEYX_4: 0.2 #.2 *.2@-692.74,-316 U6.12 | length 2723.5
  Top Layer w7: v1(-350,-575) -305,-530 -245,-530 -215,-500 -215,-335 -182.87,-302.87 U6.12@-182.87,-268.74 ; v1@-350,-566.69 ccw(c-350,-546.62) -335.81,-560.81 ccw(c-321.62,-575) v1@-341.69,-575
  Top Layer w7.87: v1(-725,-90) v1(-590,-90) ; v1@-719.43,-95.57 cw(c-705.99,-109.01) -705.99,-90 cw(c-705.99,-70.99) v1@-719.43,-84.43 ; v1@-595.57,-95.57 ccw(c-609.01,-109.01) -609.01,-90 ccw(c-609.01,-70.99) v1@-595.57,-84.43
  Bottom Layer w7: 0.2@-491.06,-90 0.2@-488.37,-92.7
  Bottom Layer w10: v1@-731.81,-90 ccw(c-748.25,-90) -736.63,-78.37 ccw(c-725,-66.75) v1@-725,-83.19 ; v1@-720.18,-94.82 cw(c-708.56,-106.44) -708.56,-90 cw(c-708.56,-73.56) v1@-720.18,-85.18 ; v1@-718.6,-90 ccw(c-718.6,-78.01) 0.2@-710.13,-86.49 ; -718.62,456.38 cw(c-703.56,441.33) #.2@-703.56,462.62 ; -718.52,456.48 ccw(c-733.44,471.4) #.2@-712.34,471.4 ; 0.2@-711.29,-97.46 ccw(c-725,-106.32) v1(-725,-90) ; 0.2@-688.47,-98.91 cw(c-733.07,-143.5) -670,-143.5 ; 0.2@-681.4,-91.83 cw(c-708.92,-119.36) -670,-119.36 ; *.2@-681.05,-316.87 ccw(c-707.71,-290.2) -670,-290.2 ; #.2@-675.7,465.19 cw(c-660.71,450.2) -660.71,471.4 cw(c-660.71,492.59) #.2@-675.7,477.61 ; v1(-590,-90) 0.2@-491.06,-90 ; v1@-585.18,-94.82 cw(c-573.56,-106.44) -573.56,-90 cw(c-573.56,-73.56) v1@-585.18,-85.18 ; -526.9,-90 cw(c-526.9,-120.4) 0.2@-505.4,-98.9 ; -513.88,-90 ccw(c-513.88,-78.01) 0.2@-505.4,-86.49 ; #.2@-505.05,465.19 ccw(c-520.03,450.2) -520.03,471.4 ccw(c-520.03,492.59) #.2@-505.05,477.61 ; #.2@-488.01,471.4 #.2@-692.74,471.4 -703.6,471.4 -745,430 -745,-70 v1(-725,-90) ; v1@-354.82,-579.82 ccw(c-366.44,-591.44) -366.44,-575 ccw(c-366.44,-558.56) v1@-354.82,-570.18 ; v1(-350,-575) -390,-575 -435,-530 -545,-530 -565,-510 -565,-430 -670,-325 *.2@-670,-316 ; v1(-725,-90) -695.79,-90 0.2@-693.09,-92.7 -682.3,-92.7 -670,-105 -670,-290.2 ; *.2@-670,-316 -670,-290.2 ; *.2@-670,-316 *.2@-692.74,-316 -692.74,-312.93 -670,-290.2
KEYY_1: 3.1 6.1 9.1 #.1 U6.5 | length 3799.7
  Top Layer w7: v1(-430,-575) -390,-575 -350,-535 -350,-485 -385,-450 -385,-395 -365,-375 -365,-240 -322.87,-197.87 U6.5@-253.74,-197.87 ; v1@-424.12,-580.88 cw(c-409.94,-595.06) -409.94,-575 cw(c-409.94,-554.94) v1@-424.12,-569.12
  Top Layer w7.87: v1(-775,325) v1(-700,325) v1(-500,325) ; v1@-769.43,319.43 cw(c-755.99,305.99) -755.99,325 cw(c-755.99,344.01) v1@-769.43,330.57 ; v1@-705.57,319.43 ccw(c-719.01,305.99) -719.01,325 ccw(c-719.01,344.01) v1@-705.57,330.57 ; v1@-694.43,319.43 cw(c-680.99,305.99) -680.99,325 cw(c-680.99,344.01) v1@-694.43,330.57 ; v1@-505.57,319.43 ccw(c-519.01,305.99) -519.01,325 ccw(c-519.01,344.01) v1@-505.57,330.57
  Bottom Layer w10: v1@-779.82,320.18 cw(c-790.69,309.31) -775.31,309.31 ; -775.31,307.81 cw(c-757.81,307.81) v1@-770.18,320.18 ; v1@-775.31,324.69 -775.31,-94.69 -745,-125 -745,-330 -710,-365 -660,-365 -590,-435 -590,-520 -560,-550 -455,-550 v1(-430,-575) ; #.1@-495.18,320.18 cw(c-481.8,306.8) #.1@-481.8,325.73 ; #.1@-495.18,329.82 ccw(c-485.32,339.68) #.1@-485.32,325.73 ; #.1@-494.5,329.02 ccw(c-488.01,333.77) #.1@-488.01,325.73 ; #.1@-493.86,322.05 cw(c-488.01,319.24) #.1@-488.01,325.73 ; #.1@-470.98,319.52 cw(c-455.99,304.53) -455.99,325.73 cw(c-455.99,346.92) #.1@-470.98,331.94 ; v1@-436.81,-575 ccw(c-453.25,-575) -441.63,-563.37 ccw(c-430,-551.75) v1@-430,-568.19 ; 9.1@-316.07,319.52 ccw(c-331.06,304.53) -331.06,325.73 ccw(c-331.06,346.92) 9.1@-316.07,331.94 ; 9.1@-282,319.52 cw(c-267.01,304.53) -267.01,325.73 cw(c-267.01,346.92) 9.1@-282,331.94 ; 9.1@-111.35,319.52 ccw(c-126.33,304.53) -126.33,325.73 ccw(c-126.33,346.92) 9.1@-111.35,331.94 ; 9.1@-77.28,319.52 cw(c-62.29,304.53) -62.29,325.73 cw(c-62.29,346.92) 9.1@-77.28,331.94 ; 6.1@77.63,319.52 ccw(c62.64,304.53) 62.64,325.73 ccw(c62.64,346.92) 6.1@77.63,331.94 ; 6.1@111.7,319.52 cw(c126.69,304.53) 126.69,325.73 cw(c126.69,346.92) 6.1@111.7,331.94 ; 266.25,343.75 ccw(c288.56,366.06) 6.1@288.56,334.51 ; 6.1@276.61,333.39 cw(c268.95,325.73) 6.1@279.78,325.73 ; 6.1@316.42,319.52 cw(c331.41,304.53) 331.41,325.73 cw(c331.41,346.92) 6.1@316.42,331.94 ; 3.1@471.33,319.52 ccw(c456.34,304.53) 456.34,325.73 ccw(c456.34,346.92) 3.1@471.33,331.94 ; 3.1@505.4,319.52 cw(c520.39,304.53) 520.39,325.73 cw(c520.39,346.92) 3.1@505.4,331.94 ; 3.1@676.06,319.52 ccw(c661.07,304.53) 661.07,325.73 ccw(c661.07,346.92) 3.1@676.06,331.94 ; 3.1@693.09,325.73 6.1@299.39,325.73 284.27,325.73 255,355 180,355 150.73,325.73 9.1@-94.31,325.73 9.1@-299.04,325.73 #.1@-488.01,325.73
KEYY_2: 0.1 2.1 5.1 8.1@-94.31,-67.97 U6.6 | length 4395.8
  Top Layer w7: v1@-360.88,-429.12 ccw(c-375.06,-414.94) -355,-414.94 ccw(c-334.94,-414.94) v1@-349.12,-429.12 ; v1(-355,-435) -355,-390 -345,-380 -345,-245 -313.62,-213.62 U6.6@-253.74,-213.62
  Top Layer w10: v1(-600,52.97) -550,102.97 -550,225 v1(-575,250) ; v1@-600,59.78 ccw(c-600,76.23) -588.37,64.6 ccw(c-576.75,52.97) v1@-593.19,52.97 ; v1@-575,243.19 cw(c-575,226.75) -563.37,238.37 cw(c-551.75,250) v1@-568.19,250 ; v1(-80,190) -50,220 v1(-50,400) ; v1@-80,196.81 ccw(c-80,213.25) -68.37,201.63 ccw(c-56.75,190) v1@-73.19,190 ; v1@-54.82,395.18 cw(c-66.44,383.56) -50,383.56 cw(c-33.56,383.56) v1@-45.18,395.18 ; v1@90.18,4.82 ccw(c79.36,15.64) 94.67,15.64 ; v1@94.67,0 94.67,99.67 v1(160,165) ; 94.67,17.25 ccw(c112.25,17.25) v1@99.82,4.82 ; v1@153.19,165 cw(c136.75,165) 148.37,153.37 cw(c160,141.75) v1@160,158.19
  Bottom Layer w10: 0.1@-693.09,52.97 -645,52.97 ; 0.1@-676.06,46.76 cw(c-661.07,31.78) -661.07,52.97 cw(c-661.07,74.17) 0.1@-676.06,59.18 ; v1@-604.82,48.16 ccw(c-616.44,36.53) -616.44,52.97 ccw(c-616.44,69.42) v1@-604.82,57.79 ; v1@-595.18,48.16 cw(c-583.56,36.53) -583.56,52.97 cw(c-583.56,69.42) v1@-595.18,57.79 ; v1@-579.82,254.82 ccw(c-591.44,266.44) -575,266.44 ccw(c-558.56,266.44) v1@-570.18,254.82 ; v1(-575,250) -575,335 -550,360 -385,360 -345,400 v1(-50,400) ; 0.1@-505.4,46.76 ccw(c-520.39,31.78) -520.39,52.97 ccw(c-520.39,74.17) 0.1@-505.4,59.18 ; 0.1@-488.37,52.97 v1(-600,52.97) -645,52.97 ; v1@-361.81,-435 ccw(c-378.25,-435) -366.63,-423.37 ccw(c-355,-411.75) v1@-355,-428.19 ; v1(-355,-435) -380,-410 -525,-410 -575,-360 -575,-275 -645,-205 -645,52.97 ; 8.1@-100.52,-61.76 ccw(c-115.51,-46.78) -94.31,-46.78 ccw(c-73.12,-46.78) 8.1@-88.1,-61.76 ; 8.1@-94.31,-67.97 -94.31,-44.31 -50,0 v1(95,0) ; v1(-80,190) 135,190 v1(160,165) ; v1@-75.18,185.18 cw(c-63.56,173.56) -63.56,190 cw(c-63.56,206.44) v1@-75.18,194.82 ; v1@-54.82,395.18 ccw(c-66.44,383.56) -66.44,400 ccw(c-66.44,416.44) v1@-54.82,404.82 ; 5.1@88.46,-61.76 ccw(c73.47,-46.78) 94.67,-46.78 ccw(c115.86,-46.78) 5.1@100.87,-61.76 ; v1@90.18,4.82 cw(c78.56,16.44) 78.56,0 cw(c78.56,-16.44) 90.18,-4.82 cw(c79.36,-15.64) 94.67,-15.64 ; 5.1@94.67,-67.97 94.67,-0.33 225.33,-0.33 292.97,-67.97 5.1@299.39,-67.97 2.1@693.09,-67.97 ; 94.67,-17.25 cw(c112.25,-17.25) 99.82,-4.82 cw(c110.64,-15.64) 110.64,-0.33 ; v1@99.82,4.82 ccw(c112.25,17.25) 112.25,-0.33 ; v1@153.19,165 ccw(c136.75,165) 148.37,176.63 ccw(c160,188.25) v1@160,171.81 ; 270.46,-45.46 cw(c247.94,-67.97) 5.1@279.78,-67.97 ; 5.1@281.1,-56.1 ccw(c288.56,-48.64) 5.1@288.56,-59.19 ; 5.1@316.42,-74.18 cw(c331.41,-89.17) 331.41,-67.97 cw(c331.41,-46.78) 5.1@316.42,-61.76 ; 2.1@471.33,-74.18 ccw(c456.34,-89.17) 456.34,-67.97 ccw(c456.34,-46.78) 2.1@471.33,-61.76 ; 2.1@505.4,-74.18 cw(c520.39,-89.17) 520.39,-67.97 cw(c520.39,-46.78) 2.1@505.4,-61.76 ; 2.1@676.06,-74.18 ccw(c661.07,-89.17) 661.07,-67.97 ccw(c661.07,-46.78) 2.1@676.06,-61.76
KEYY_3: 1.1 4.1 7.1 *.1@-488.01,-461.67 U6.10 | length 1911.4
  Top Layer w7: -267.72,-442.28 ccw(c-245,-419.55) v1@-245,-451.69 ; -255.77,-454.23 ccw(c-245,-443.45) v1@-245,-458.69 ; -255.65,-454.35 cw(c-261.3,-460) v1@-253.31,-460 ; v1@-250,-460 -275,-435 -275,-345.12 -214.37,-284.49 U6.10@-214.37,-268.74 ; -219.29,-289.41 ccw(c-230.12,-278.58) U6.10@-214.81,-278.58
  Bottom Layer w10: *.1@-488.01,-461.67 7.1@-299.04,-461.67 -245,-461.67 -231.67,-475 -125,-475 ; *.1@-470.98,-467.88 cw(c-455.99,-482.87) -455.99,-461.67 cw(c-455.99,-440.48) *.1@-470.98,-455.47 ; 7.1@-316.07,-467.88 ccw(c-331.06,-482.87) -331.06,-461.67 ccw(c-331.06,-440.48) 7.1@-316.07,-455.47 ; 7.1@-282,-467.88 cw(c-267.01,-482.87) -267.01,-461.67 cw(c-267.01,-440.48) 7.1@-282,-455.47 ; -265.48,-461.67 ccw(c-265.48,-439.52) v1@-249.82,-455.18 ; -257.4,-461.67 cw(c-257.4,-472.4) v1@-249.82,-464.82 ; v1@-245,-466.81 cw(c-245,-479.21) -236.23,-470.44 ; v1@-238.19,-460 ccw(c-217.71,-460) -232.19,-474.48 ; 7.1@-107.33,-470.17 ccw(c-111.94,-488.06) -125,-475 ; 7.1@-77.28,-467.88 cw(c-62.29,-482.87) -62.29,-461.67 cw(c-62.29,-440.48) 7.1@-77.28,-455.47 ; 4.1@77.63,-467.88 ccw(c62.64,-482.87) 62.64,-461.67 ccw(c62.64,-440.48) 4.1@77.63,-455.47 ; 4.1@111.7,-467.88 cw(c126.69,-482.87) 126.69,-461.67 cw(c126.69,-440.48) 4.1@111.7,-455.47 ; 4.1@282.35,-467.88 ccw(c267.37,-482.87) 267.37,-461.67 ccw(c267.37,-440.48) 4.1@282.35,-455.47 ; 4.1@316.42,-467.88 cw(c331.41,-482.87) 331.41,-461.67 cw(c331.41,-440.48) 4.1@316.42,-455.47 ; 1.1@471.33,-467.88 ccw(c456.34,-482.87) 456.34,-461.67 ccw(c456.34,-440.48) 1.1@471.33,-455.47 ; 1.1@505.4,-467.88 cw(c520.39,-482.87) 520.39,-461.67 cw(c520.39,-440.48) 1.1@505.4,-455.47 ; 1.1@676.06,-467.88 ccw(c661.07,-482.87) 661.07,-461.67 ccw(c661.07,-440.48) 1.1@676.06,-455.47 ; 1.1@693.09,-461.67 4.1@299.39,-461.67 7.1@-94.31,-461.67 -111.67,-461.67 -125,-475
  other v1: -245,-460
M3V3: C1.1 C20.1 C23.1 C39.1 C41.1 C42.1 J1.1 Q2.S R2.1 R3.1 U4.2 U6.16 UB1.8 | length 4254.2
  Top Layer w12: UB1.8@-525,-568.93 UB1.8@-524.59,-569.35 ; R2.1@-505.86,-424.14 -490,-440 C39.1@-490,-480 ; U6.16@-117,-268.74 -11.26,-268.74 0,-280
  Top Layer w16: -540,-540.65 ccw(c-520.94,-540.65) UB1.8@-534.42,-554.13 ; UB1.8@-525,-568.93 -540,-553.93 -540,-515 v1(-525,-500) -505,-480 C39.1@-490,-480 ; v1@-521.32,-500.99 cw(c-507.28,-504.75) -514.54,-492.16 ; v1@-520.73,-495.73 cw(c-490,-526.46) C39.1@-490,-483
  Top Layer w20: v1@-605,-314.3 ccw(c-582.59,-314.3) R3.1@-598.44,-330.15 ; v1(-605,-310) -605,-325 R3.1@-599.14,-330.86 cw(c-585.87,-317.59) v1@-603.32,-310.67 ; C1.1@-102.17,-575 C1.1@-77.17,-575 ; C1.1@-82.05,-563.15 ccw(c-99.05,-546.14) v1@-75,-546.14 ; -75,-547.09 ccw(c-52.29,-547.09) C1.1@-68.35,-563.15 ; v1(-75,-535) -75,-572.83 C1.1@-77.17,-575 ; C1.1@-47.64,-560.32 ccw(c-47.64,-506.42) -9.53,-544.53 ; 0,-280 50,-330 C42.1@80,-330 77,-333 C41.1@77,-385 0,-462 v1(0,-535) -40,-575 C1.1@-77.17,-575 ; C41.1@63.83,-398.17 cw(c77,-411.35) C41.1@77,-392.72 ; Q2.S@712.4,-180 C23.1@765,-180 ; Q2.S@718.06,-185.66 cw(c731.72,-199.31) 731.72,-180 cw(c731.72,-160.69) Q2.S@718.06,-174.34 ; v1(750,145) 750,-85 765,-100 765,-115 ; 755.8,-180 ccw(c755.8,-155.77) C23.1@772.94,-172.9 ; U4.2@756.94,-254.34 ccw(c737.49,-234.89) 765,-234.89 ; U4.2@762.6,-268 cw(c762.6,-287.31) 776.25,-273.66 cw(c789.91,-260) U4.2@770.6,-260 ; 765,-219.82 cw(c819.85,-219.82) C23.1@781.06,-181.03 ; 765,-152.21 cw(c816.21,-152.21) C20.1@780,-116 ; 765,-130.18 ccw(c819.85,-130.18) C23.1@781.06,-168.97 ; C23.1@777,-175 772,-180 C23.1@765,-180 ; C20.1@780,-115 765,-115 ; v1(870,-300) 802.6,-300 U4.2@762.6,-260 765,-257.6 C23.1@765,-180 ; C23.1@765,-180 765,-115 ; -9.34,-544.42 ccw(c-17.48,-530.32) -1.75,-534.53 cw(c-17.48,-530.32) -9.34,-544.42
  Bottom Layer w10: v1(-605,-310) -605,-360 -540,-425 -540,-485 v1(-525,-500) ; v1@-530.81,-500 ccw(c-544.84,-500) -534.92,-490.08 ccw(c-525,-480.16) v1@-525,-494.19
  Bottom Layer w12: v1@-609.11,-314.11 cw(c-619.03,-324.03) -605,-324.03 cw(c-590.97,-324.03) v1@-600.89,-314.11 ; v1(-525,-500) -325,-500 -290,-535 ; v1@-520.89,-504.11 cw(c-510.97,-514.03) -510.97,-500 cw(c-510.97,-485.97) v1@-520.89,-495.89
  Bottom Layer w20: -290,-535 v1(-75,-535) v1(0,-535) 175,-535 205,-505 730,-505 762.5,-472.5 762.5,-412.5 795,-380 795,-340 v1(835,-300) ; J1.1@298.15,193.15 cw(c281.62,176.62) 305,176.62 ; J1.1@305,200 305,170 330,145 v1(750,145)
  Bottom Layer w30: v1(835,-300) v1(870,-300)
NetBZ1_1: BZ1.1 C24.2 R47.1 | length 336.8
  Top Layer w16: BZ1.1@804.32,180.58 cw(c804.32,142.87) 830.99,169.53 cw(c857.66,196.2) BZ1.1@819.94,196.2 ; BZ1.1@804.32,196.2 907,93.52 907,11.22 R47.1@907,-38.78
NetBZ1_2: BZ1.2 T1.3 | length 455.8
  Top Layer w16: BZ1.2@634.4,208.64 ccw(c604.37,238.67) 646.84,238.67 ccw(c689.31,238.67) BZ1.2@659.28,208.64 ; BZ1.2@646.84,196.2 646.84,246.84 646.84,296.84 725,375 T1.3@725,515 ; T1.3@717.93,504.28 cw(c700.86,487.2) 725,487.2 cw(c749.14,487.2) T1.3@732.07,504.28
NetC2_2: C2.2 U6.2 X1.1 | length 421.8
  Top Layer w7: C2.2@-510,-72 C2.2@-508.78,-72 ; C2.2@-510,-70.78 C2.2@-508.78,-72 ; C2.2@-504.4,-74.6 cw(c-498.14,-80.86) -498.14,-72 ; C2.2@-504.4,-65.4 ccw(c-488.48,-49.48) -488.48,-72 ; -485.54,-72 cw(c-485.54,-103.61) X1.1@-463.19,-81.26 ; -482.65,-72 ccw(c-482.65,-44.47) X1.1@-463.19,-63.94 ; X1.1@-454.53,-86.81 cw(c-454.53,-121.14) -430.26,-96.87 ; X1.1@-454.53,-79.81 cw(c-454.53,-97.24) X1.1@-442.21,-84.92 ; X1.1@-442.28,-74.57 ccw(c-417.46,-74.57) -435.01,-92.12 ; U6.2@-253.74,-150.63 -324.37,-150.63 -365,-110 -417.13,-110 X1.1@-454.53,-72.6 -455.13,-72 C2.2@-508.78,-72
NetC6_2: C6.2 RW2.2 RW3.2 | length 234.6
  Top Layer w8: RW2.2@-139,859 cw(c-139,842.1) -127.05,854.05 ; RW2.2@-139,871 ccw(c-139,895.14) -121.93,878.07 ; RW2.2@-133,865 ccw(c-120.93,865) RW2.2@-129.46,856.46 ; C6.2@-130.31,820.28 ccw(c-150.36,840.33) -122,840.33 ccw(c-93.64,840.33) C6.2@-113.69,820.28 ; C6.2@-122,810 -122,849 -140,867 -133,867 -97,903 RW3.2@-90,903 ; -108.07,891.93 cw(c-91,874.86) RW3.2@-91,899
NetC29_1: 
NetC29_2: 
NetC30_1: C30.1 L2.1 | length 69
  Top Layer w24: L2.1@-260,78 C30.1@-260,147
NetC34_1: C34.1 U6.19 | length 266.6
  Top Layer w7.87: U6.19@-96.26,-213.62 68.62,-213.62 ; 40.31,-213.62 cw(c40.31,-263.69) C34.1@75.71,-228.29 ; 59.32,-213.62 cw(c59.32,-244.68) C34.1@81.28,-222.72 ; C34.1@70.36,-215.36 cw(c61.71,-224) C34.1@73.94,-224 ; C34.1@79.73,-217.94 cw(c79.09,-203.16) 68.62,-213.62 ; C34.1@80,-225 68.62,-213.62
NetC37_1: C37.1 U6.17 | length 213.7
  Top Layer w7.87: U6.17@-96.26,-245.12 15.12,-245.12 50,-280 C37.1@80,-280 ; C37.1@75.71,-284.29 ccw(c65.36,-294.64) 65.36,-280 ccw(c65.36,-265.36) C37.1@75.71,-275.71
NetC37_2: C37.2 U6.18 | length 260.2
  Top Layer w7.87: U6.18@-96.26,-229.37 29.37,-229.37 55,-255 95,-255 C37.2@120,-280 ; 107.94,-267.94 ccw(c120,-255.89) C37.2@120,-272.94 ; C37.2@110.36,-270.36 cw(c101.71,-279) C37.2@113.94,-279